# Altium PCB MP2329GG_EVB.PcbDoc
Units mm, origin at the board's own origin, x right, y up, seen from the top; angles counter-clockwise.
Board outline 85.7 x 46.6 mm, 2 copper layers (Top Layer, Bottom Layer); 23 components, 9 nets, 63 pads, 11 vias.
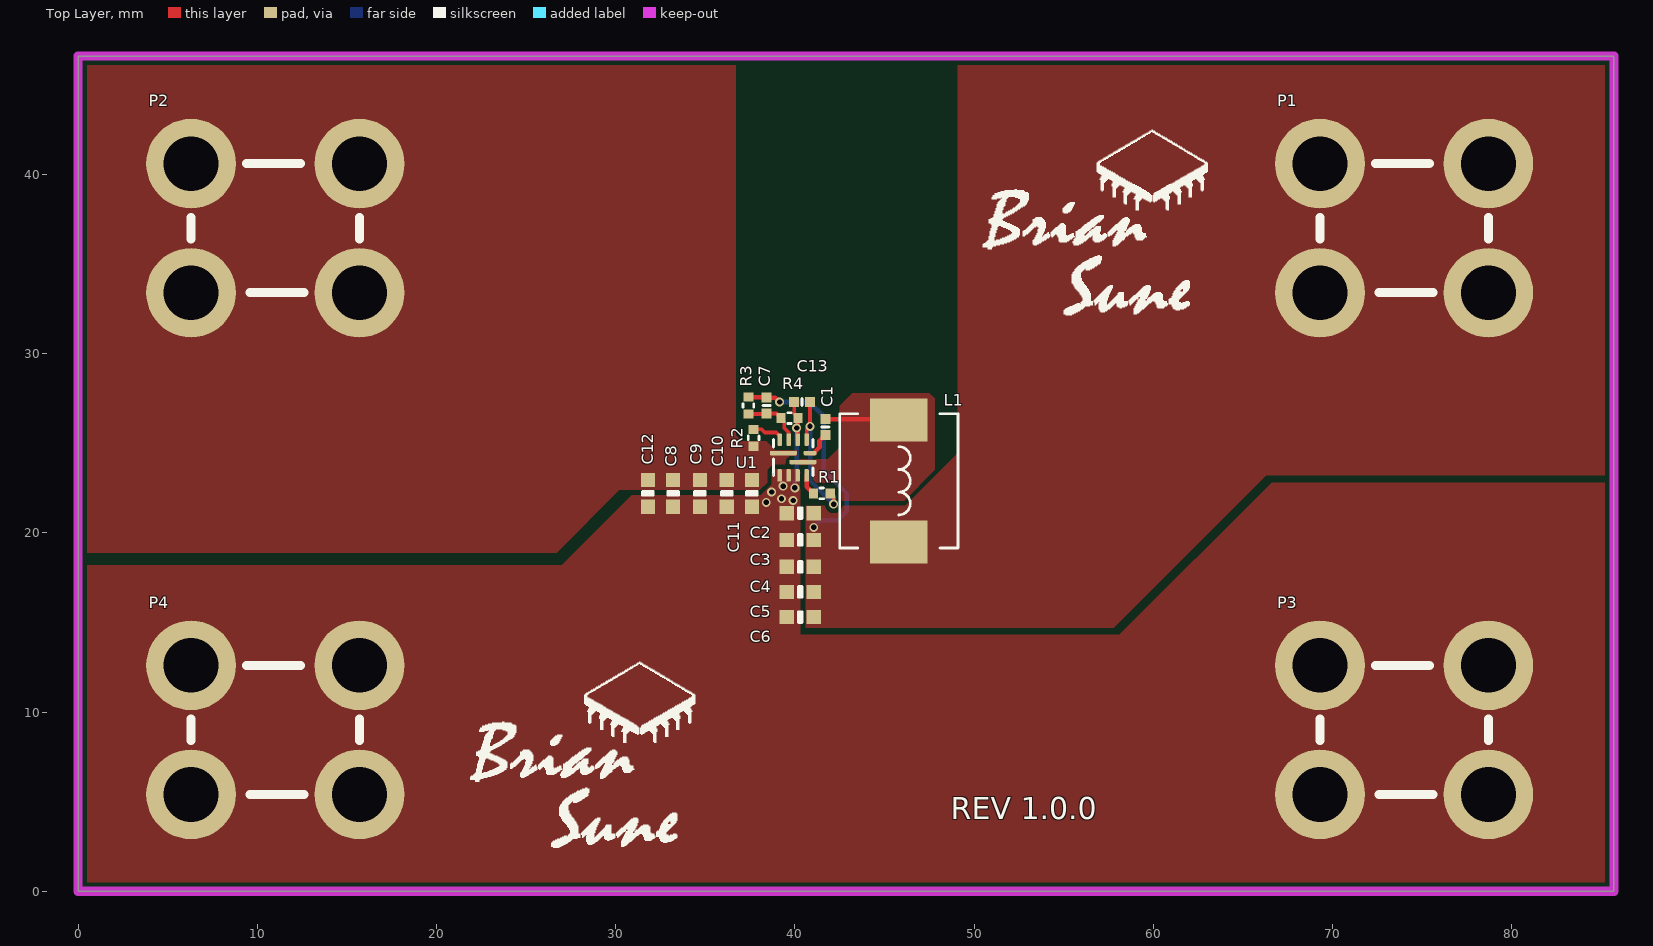
[diagram p0: Top Layer view]
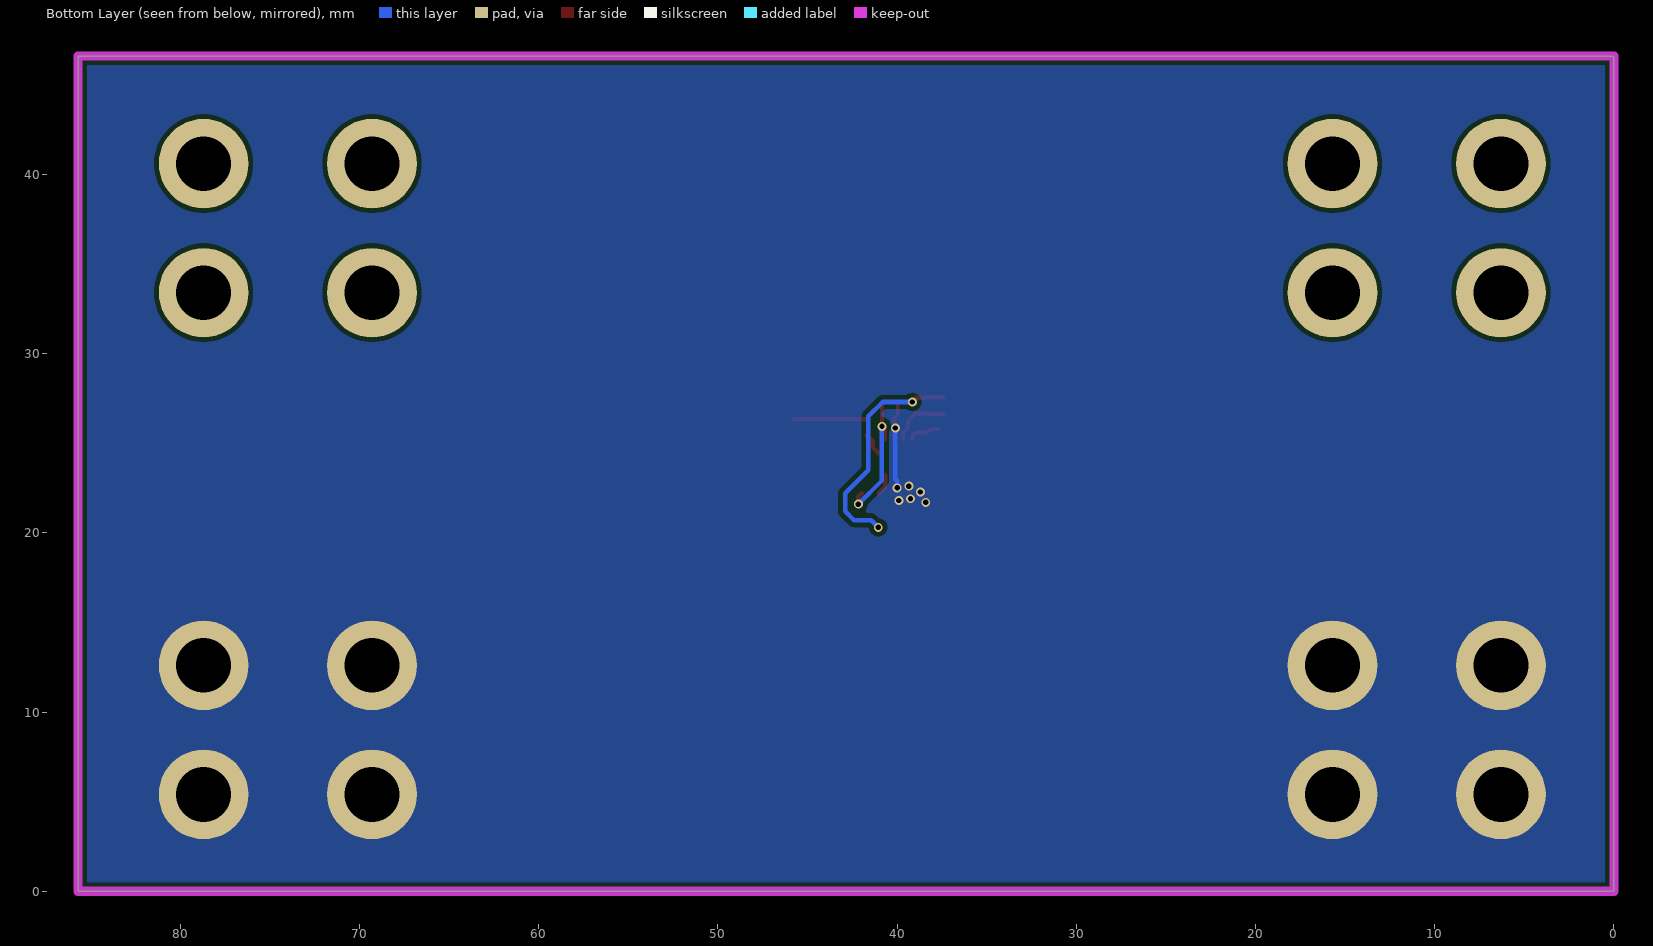
[diagram p1: Bottom Layer view, seen from below]
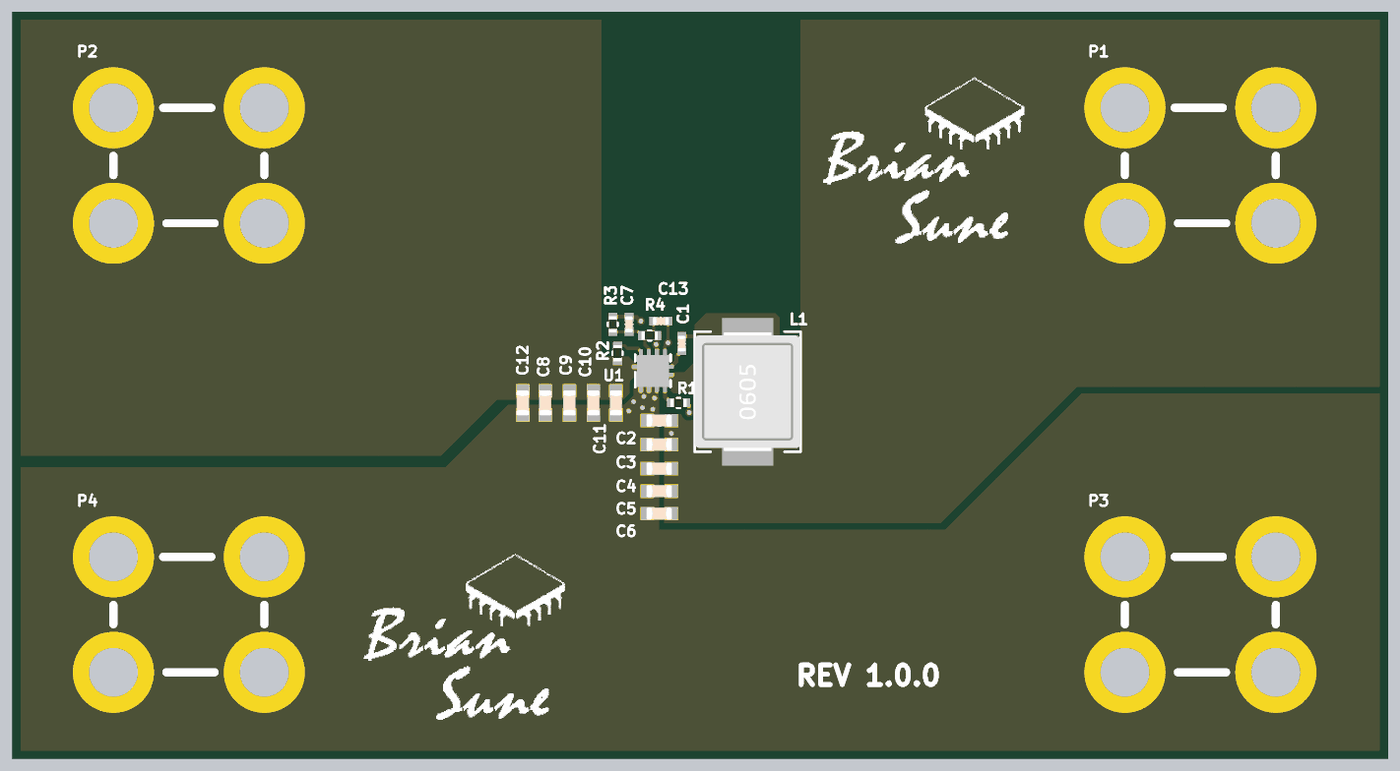
[diagram p2: 3D render of the assembled board from above, using the file's embedded part models]

## Layer stack, top to bottom
Top Solder: solder mask 0.0102, Solder Resist, Dk 3.5
Top Layer: signal copper 0.0356
Dielectric 1: dielectric 0.32, FR-4, Dk 4.8
Bottom Layer: signal copper 0.0356
Bottom Solder: solder mask 0.0102, Solder Resist, Dk 3.5

## Board outline
0,0 85.7,0 85.7,46.6 0,46.6

## Design rules (kind name [scope] priority, off if disabled: settings)
Clearance [All] p1: gap=0.152 ignorepadtopadclearanceinfootprint=FALSE except(0: Arc-Hole Track-Hole SMDPad-Hole THPad-Hole Via-Hole Fill-Hole Poly-Hole Region-Hole Text-Hole; 0.178: SMDPad-Poly; 0.203: SMDPad-Region THPad-Region Poly-Region; 0.254: Arc-Poly Track-Poly THPad-Poly Via-Poly Fill-Poly Poly-Poly)
ComponentClearance [All] p1: gap=0.3 collisioncheckmode=3 verticalgap=0.3 showdistances=FALSE
DiffPairsRouting [All] p1: maxlimit=0.254 minlimit=0.152 mostfreqgap=0.203 toplayer_minwidth=0.152 toplayer_maxwidth=0.381 toplayer_prefwidth=0.203 bottomlayer_minwidth=0.152 bottomlayer_maxwidth=0.381 bottomlayer_prefwidth=0.203 maxuncoupledlength=12.7
Height [All] p1: minheight=0 maxheight=40 prefheight=12.7
HoleSize [All] p1: absolutevalues=TRUE maxlimit=6 minlimit=0.025 maxpercent=80.000 minpercent=20.000
HoleToHoleClearance [All] p1: gap=0.076 allowstackedmicrovias=TRUE
MinimumSolderMaskSliver [All] p1: minsoldermaskwidth=0.025
PlaneConnect [All] p1: planeconnectstyle=Direct reliefexpansion=0.508 reliefentries=4 reliefconductorwidth=0.254 reliefairgap=0.254
PolygonConnect [All] p1: connectstyle=Direct reliefconductorwidth=0.305 reliefentries=4 polygonreliefangle="90 Angle" airgapwidth=0.305
RoutingVias [All] p1: holewidth=0.4 width=0.6 viastyle="Through Hole" minholewidth=0.3 minwidth=0.5 maxholewidth=2.8 maxwidth=3
SilkToSilkClearance [All] p1: silktosilkclearance=0.076
SilkToSolderMaskClearance [IsPad] p1: minsilkscreentomaskgap=0.025 clearancetoexposedcopper=TRUE
SolderMaskExpansion [All] p1: expansion=0.025
Width [All] p1: maxlimit=1.016 minlimit=0.152 preferedwidth=0.254
21 further rules are at their usual default settings.

## Components (designator, comment, footprint, x,y, rotation, side; value= is the part's Value field where it differs from the comment)
C1 "100nF" 0402#1 41.7,25.9 r90 top
C2 "10uF" C0603 40.3,21.1 r0 top
C3 "10uF" C0603 40.3,19.6 r0 top
C4 "10uF" C0603 40.3,18.1 r0 top
C5 "10uF" C0603 40.3,16.7 r0 top
C6 "100nF" C0603 40.3,15.3 r0 top
C7 "15pF" 0402#1 38.417,27.1 r90 top
C8 "10uF" C0603 33.2,22.2 r90 top
C9 "10uF" C0603 34.7,22.2 r90 top
C10 "10uF" C0603 36.2,22.2 r90 top
C11 "10uF" C0603 37.6,22.2 r90 top
C12 "100nF" C0603 31.8,22.2 r90 top
C13 "1uF" 0402#1 40.4,27.3 r0 top
L1 "4.7uH" 0650SMD 45.8,22.9 r90 top
P1 "M4_CON" PCBComponent_1 74,37 r90 top
P2 "M4_CON" PCBComponent_1 11,37 r90 top locked
P3 "M4_CON" PCBComponent_1 74,9 r90 top
P4 "M4_CON" PCBComponent_1 11,9 r90 top
R1 "100k" 0402#2 41.5,22.2 r0 top
R2 "0R" 0402#2 37.7,25.3 r90 top
R3 "40k2" 0402#2 37.4,27.1 r270 top
R4 "2k1" 0402#2 39.7,26.4 r0 top
U1 "MP2329" QFN2x2 39.9,24.2 r0 top

## Footprints (in the part's own frame and the unit in brackets; to place one, negate y for a bottom-side part, rotate by r counter-clockwise, add the part's x,y. Pads: shape width x height; smd on the part's side, far side on the other; paste and mask are expansions set on the pad)
0402#1 [mil]
  rect 22x22 smd: 1(-17.5,0) 2(17.5,0)
  silkscreen extent 0,-8 0,8, body extent -20,-10 20,10, height 20
0402#2 [mil]
  rect 20x22 smd: 1(-18.5,0) 2(18.5,0)
  silkscreen extent -4,-12 4,12, body extent -20,-10 20,10, height 14
0650SMD [mm]
  rect 2.4x3.2 smd paste+0 mask+0: 1(-3.4,0) 2(3.4,0)
  silkscreen extent -3.75,-3.3 3.75,3.3, body extent -3.7,-3.3 3.7,3.3, height 5.05
C0603 [mm]
  rect 0.8x0.8 smd: 1(-0.75,0) 2(0.75,0)
  silkscreen extent -0.1,-0.3 0.1,0.3, body extent -0.8,-0.4 0.8,0.4, height 0.81
PCBComponent_1 [mm]
  round 5 hole 3.05: 1(-3.6,-4.7) 1(-3.6,4.7) 1(3.6,-4.7) 1(3.6,4.7)
  silkscreen extent -3.6,-4.7 3.6,4.7
QFN2x2 [mm]
  rrect50% 1.499x0.25 smd: 1(-0.544,0.25) 6(0.544,-0.25)
  rrect50% 0.25x0.7 smd: 2(-0.75,-1) 2(-0.25,-1) 2(0.25,-1) 5(0.75,-1) 8(0.75,1) 9(0.25,1) 10(-0.25,1) 11(-0.75,1)
  rrect50% 0.711x0.25 smd: 7(0.944,0.25)
  silkscreen extent -1.1,-1 1.1,1, body extent -1,-1 1,1, height 0.87

## Part data
C1: library part OBEIDUN_100nF, "0402 100NF 104K  50V X7R", Mfr.=OBEIDUN, Mfr. No=104K, ComponentLink1Description=taobao, ComponentLink1URL=https://detail.tmall.com/item.htm?abbucket=11&id=610169377419&rn=af8cc3c313be083494688299e412f071&skuId=4460562122099&spm=a1z10.3-b.w4011-22147617817.47.43b27d1eVfSLTc, Price=0.03
C2 C3 C4 C5 C8 C9 C10 C11: library part OUDEIBUN_10uF_25V, "OUDEIBUN / 25V 10% 106K X5R", Mfr.=OUDEIBUN, Mfr. No=106, ComponentLink1Description=taobao, ComponentLink1URL=https://detail.tmall.com/item.htm?abbucket=11&id=610884231672&rn=bfecce7903ee26d41e055cbdf2d2e6eb&skuId=4463564134688&spm=a1z10.3-b.w4011-22147617817.28.ed547d1efUUngR, Price=0.1
C6 C12: library part OUDEIBUN_100nF, "0603 100NF 50V 10% 104K X7R", Mfr.=OUDEIBUN, Mfr. No=104K, ComponentLink1Description=taobao, ComponentLink1URL=https://detail.tmall.com/item.htm?_u=p10quk0k2f35&id=610651934672&spm=a1z09.2.0.0.77b12e8d9iVia0&skuId=4463522550238, Price=0.025
C7: library part OBEIDUN_15PF, "0402 15PF 50V 150J COG NPO", Mfr.=OBEIDUN, Mfr. No=150J, ComponentLink1Description=taobao, ComponentLink1URL=https://detail.tmall.com/item.htm?abbucket=11&id=609566086851&rn=9c23be302cc76959a38b5b2aeca1aa2d&spm=a1z10.3-b.w4011-22147617817.45.7cb37d1eI3FZvy&skuId=4450905106486, Price=0.02
C13: library part OBEIDUN_1uF_10V, "0402 1uF 105K  10V X5R", Mfr.=OBEIDUN, Mfr. No=105K, ComponentLink1Description=taobao, ComponentLink1URL=https://detail.tmall.com/item.htm?abbucket=11&id=610172645232&rn=f8e73e5cbdb7eccb6b86c37cd9a91747&skuId=4460600150247&spm=a1z10.3-b.w4011-22147617817.50.46817d1eu0mbEn, Price=0.025
L1: library part L0650, "6mmx5mm (LxH) DCDC Inductor SMD", Mfr.="Your Cee", Mfr. No=0650_2R2, ComponentLink1Description=taobao, ComponentLink1URL=https://item.taobao.com/item.htm?spm=a1z10.5-c-s.w4002-24706531925.25.3c7641b1SqlSXT&id=618284197303, Price=0.50
P1 P2 P3 P4: Mfr.=LFX, Mfr. No=PCB-10-4, ComponentLink1Description=taobao, ComponentLink1URL=https://item.taobao.com/item.htm?spm=a1z09.2.0.0.45712e8dxvwLo5&id=531030902005&_u=s10quk0k994a, Price=0.41
R1: library part OUDEIBUN_100k, "OUDEIBUN / 1% 100k", Mfr.=UNIOHM, ComponentLink1Description=taobao, ComponentLink1URL=https://detail.tmall.com/item.htm?abbucket=11&id=608928061564&rn=6cabffb4bef601fc6d0198b0cb480a08&spm=a1z10.3-b.w4011-22147617817.51.20d47d1eFEZrXW&skuId=4280827589222, Mfr. No=100k, Price=0.02
R2: library part OUDEIBUN_0R, "OUDEIBUN / 0R 1% 1/16W", Mfr.=OUDEIBUN, ComponentLink1Description=taobao, ComponentLink1URL=https://detail.tmall.com/item.htm?abbucket=11&id=609078082053&rn=dd22835191e181ef543cf6f0827e8de3&spm=a1z10.3-b.w4011-22147617817.40.1e787d1eBkSpf5&skuId=4447040574382, Mfr. No=0R, Price=0.02
R3: library part UNIOHM_40k2, "UNIOHM / 40k2 1% 1/16W", Mfr.=UNIOHM, ComponentLink1Description=taobao, ComponentLink1URL=https://item.taobao.com/item.htm?spm=a1z10.3-c-s.w4002-24706531953.9.4cff6a4bFcr7uh&id=525646732568, Mfr. No=40k2, Price=0.012
R4: library part OUDEIBUN_1k5, "OUDEIBUN / 1% 1k5", Mfr.=OUDEIBUN, Mfr. No=1k5, ComponentLink1Description=taobao, ComponentLink1URL=https://detail.tmall.com/item.htm?abbucket=11&id=609080898470&rn=e8ac5f428b57ca8c5f4fd2285344b596&spm=a1z10.3-b.w4011-22147617817.56.4da07d1eK35JhM&skuId=4276063084040, Price=0.02
U1: "24V, 6.5A, Low IQ, Synchronous, Buck Converter", Mfr.="Monolithic Power Systems", ComponentLink1Description=taobao, ComponentLink1URL=https://detail.tmall.com/item.htm?spm=a1z0d.6639537/tb.1997196601.4.78517484v1qEmf&id=680225556463, Mfr. No=MP2329, Price=1.8

## Via types
v1: diameter 0.5, hole 0.3, Top Layer to Bottom Layer, tented both sides, 11 vias

## Nets (pads, with @x,y where several pads share a name; then routed paths per layer and width w, separated by ;. In a path a pad name is that pad's centre, name@x,y a point inside that pad or via, vN(x,y) a via of type N, cw(c..) or ccw(c..) an arc to the next point about the centre after c; other vN are vias at no path point)
GND: C2.1 C3.1 C4.1 C5.1 C6.1 C8.1 C9.1 C10.1 C11.1 C12.1 C13.1 P3.1 P4.1 R4.2 U1.2 U1.9 | length 5.6
  Top Layer w0.203: C13.1 39.956,26.614 R4.2
  Top Layer w0.254: U1.9 40.15,25.8 v1(40.1,25.85) 40.17,25.92 R4.2
  Bottom Layer w0.254: v1(40,22.505) 40,22.9 40.1,23 v1(40.1,25.85)
  other v1: 38.4,21.7 39.9,21.8 39.249,21.9 38.7,22.275 39.344,22.6
NetC1_1: C1.1 U1.7 | length 1.5
  Top Layer w0.254: U1.7 41.05,24.45 41.372,24.772 41.372,25.128 C1.1
NetC1_2: C1.2 L1.2 U1.6 | length 4.1
  Top Layer w0.254: C1.2 45.756,26.344 L1.2
NetC7_1: C7.1 R3.2 R4.1 U1.10 | length 3.3
  Top Layer w0.203: R3.2 38.392,26.63 C7.1 38.975,26.655 R4.1 39.4,26.23 39.4,25.85 39.65,25.6 U1.10
NetR1_1: R1.1 U1.5 | length 1.2
  Top Layer w0.254: U1.5 40.65,22.58 R1.1
NetR2_2: R2.2 U1.11 | length 1.8
  Top Layer w0.203: R2.2 38.147,25.77 38.317,25.6 38.955,25.6 39.15,25.406 U1.11
VCC: C13.2 R1.2 U1.8 | length 7.8
  Top Layer w0.203: U1.8 40.65,25.75 v1(40.845,25.944) C13.2
  Top Layer w0.254: R1.2 42.164,22.006 v1(42.164,21.6)
  Bottom Layer w0.254: v1(40.845,25.944) 40.845,22.919 v1(42.164,21.6)
VIN: C8.2 C9.2 C10.2 C11.2 C12.2 P2.1 R2.1 U1.1
VOUT: C2.2 C3.2 C4.2 C5.2 C6.2 C7.2 L1.1 P1.1 R3.1 | length 12.7
  Top Layer w0.254: R3.1 38.392,27.57 C7.2 38.905,27.544 v1(39.15,27.3)
  Bottom Layer w0.254: v1(39.15,27.3) 40.8,27.3 41.6,26.5 41.6,23.5 42.9,22.2 42.9,21.2 42.4,20.7 41.45,20.7 v1(41.05,20.3)

## Polygon pours and split planes (outlines as drawn)
VOUT on Top Layer (solid, remove dead copper, pour order 0): 46.15,21.5 49.1,24.45 49.1,46.6 85.7,46.6 85.7,23.2 66.3,23.2 57.8,14.7 40.6,14.7 40.6,21.5
NetC1_2 on Top Layer (solid, remove dead copper, pour order 6): 40.9,23.8 40.9,23.1 41.2,22.8 42.4,22.8 42.6,22.6 42.6,21.8 46.1,21.8 47.8,23.5 47.8,27.5 47.5,27.8 43.2,27.8 42.5,27.1 42.5,24.772 41.828,24.1 39.7,24.1 39.7,23.8
VIN on Top Layer "VIN_L01_P004" (solid, remove dead copper, pour order 4): 38.5,23.456 38.844,23.8 39.4,23.8 39.5,23.9 39.5,24.1 39.7,24.3 40.1,24.3 40.1,24.6 38.9,24.6 38.4,25.1 37.055,25.1 36.7,25.455 36.7,46.6 0,46.6 0,18.9 26.7,18.9 30.2,22.4 38.1,22.4 38.5,22.8
GND on Top Layer "GND_L01_P002" (solid, remove dead copper, pour order 2): 38.7,23.544 40.3,23.544 40.3,14.3 58.1,14.3 66.6,22.8 85.7,22.8 85.7,0 0,0 0,18.2 27,18.2 30.9,22.1 38.1,22.1 38.7,22.7
GND on Bottom Layer "GND_L02_P008" (solid, remove dead copper, pour order 8): 0,0 0,46.6 85.7,46.6 85.7,0

## Keep-outs
Keep-Out Layer:
  the board outline again, w0.508

## Silkscreen, mask and mechanical layers (free items; w line width, h text height)
Top Overlay:
  drawing of 22 lines, arcs and shapes, not listed
  text "REV 1.0.0" at 48.7,4.022 h1.22